# EAGLE board 006rele quad (EAGLE 5.11)

Size 142.22 x 69.52 mm. Coordinates in mm from the lower left corner, seen from the top.
Outline: 0,0 142.22,0 142.22,69.52 0,69.52 0,0
Copper layers (1*16): Top 0.035mm / dielectric 1.5mm / Bottom 0.035mm
Design rules "MUITO BOM": minimum track width 20mil, minimum drill 24mil, track to track 12mil, track to pad 12mil, pad to pad 12mil, via to via 12mil, smd to smd 12mil, copper to edge 8mil, drill to drill 8mil, minimum pad ring 8mil, minimum via ring 8mil, stop-mask expansion 4mil, vias tented up to drill 0mil, thermal gap 10mil

## Footprints (pad centres in the part's own frame; a part is rotated, then mirrored left to right if it is on the bottom)
C025_050-035X075 = drill 0.5 pad 1.27 long: 1 -1.27,0 | drill 0.5 pad 1.27 offset: 2 1.27,0; 3 3.81,0
DO41-10 = drill 0.6 pad 1.778 long: A 5.08,0; C -5.08,0
DIL20 = drill 0.813 long: 1 -11.43,-3.81; 2 -8.89,-3.81; 3 -6.35,-3.81; 4 -3.81,-3.81; 5 -1.27,-3.81; 6 1.27,-3.81; 7 3.81,-3.81; 8 6.35,-3.81; 9 8.89,-3.81; 10 11.43,-3.81; 11 11.43,3.81; 12 8.89,3.81; 13 6.35,3.81; 14 3.81,3.81; 15 1.27,3.81; 16 -1.27,3.81; 17 -3.81,3.81; 18 -6.35,3.81; 19 -8.89,3.81; 20 -11.43,3.81
G5LE = drill 1.321 long: 1 -7.493,-5.969; 2 -7.493,5.969; O 4.699,5.969; P -9.525,0; S 4.699,-5.969
LED5MM = drill 0.813 octagon: A -1.27,0; K 1.27,0
0207/7 = drill 0.5 pad 1.27 long: 1 -3.81,0; 2 3.81,0
AK500/3 = drill 1.321 long: 1 -5.004,0; 2 0,0; 3 5.004,0
AK500/10 = drill 1.321 long: 1 -22.504,0; 2 -17.501,0; 3 -12.497,0; 4 -7.493,0; 5 -2.489,0; 6 2.489,0; 7 7.493,0; 8 12.497,0; 9 17.501,0; 10 22.504,0

## Placement (x,y rotation side)
C1  100NF  [C025_050-035X075]  35.56,54.61 90 top
D1  1N4004  [DO41-10]  25.4,33.02 0 top
D2  1N4004  [DO41-10]  7.62,33.02 0 top
D3  1N4004  [DO41-10]  43.18,33.02 0 top
D4  1N4004  [DO41-10]  60.96,33.02 0 top
D5  1N4004  [DO41-10]  78.74,33.02 0 top
D6  1N4004  [DO41-10]  96.52,33.02 0 top
D7  1N4004  [DO41-10]  114.3,33.02 0 top
D8  1N4004  [DO41-10]  132.08,33.02 0 top
IC1  TPIC6B596N  [DIL20]  50.8,55.88 0 top
K1  G5L  [G5LE]  8.89,19.05 270 top
K2  G5L  [G5LE]  26.67,19.05 270 top
K3  G5L  [G5LE]  44.45,19.05 270 top
K4  G5L  [G5LE]  62.23,19.05 270 top
K5  G5L  [G5LE]  80.01,19.05 270 top
K6  G5L  [G5LE]  97.79,19.05 270 top
K7  G5L  [G5LE]  115.57,19.05 270 top
K8  G5L  [G5LE]  133.35,19.05 270 top
LED1  [LED5MM]  13.97,37.47 270 top
LED2  [LED5MM]  31.75,37.47 270 top
LED3  [LED5MM]  49.53,37.47 270 top
LED4  [LED5MM]  67.31,37.47 270 top
LED5  [LED5MM]  85.09,37.47 270 top
LED6  [LED5MM]  102.87,37.47 270 top
LED7  [LED5MM]  120.65,37.47 270 top
LED8  [LED5MM]  137.79,38.1 270 top
R1  [0207/7]  6.35,35.56 180 top
R2  [0207/7]  24.13,35.56 180 top
R3  [0207/7]  41.91,35.56 180 top
R4  [0207/7]  59.69,35.56 180 top
R5  [0207/7]  77.47,35.56 180 top
R6  [0207/7]  95.25,35.56 180 top
R7  [0207/7]  113.03,35.56 180 top
R8  [0207/7]  130.81,35.56 180 top
X1  [AK500/3]  8.89,3.81 0 top
X2  [AK500/3]  26.67,3.81 0 top
X3  [AK500/3]  44.45,3.81 0 top
X4  [AK500/3]  62.23,3.81 0 top
X5  [AK500/3]  80.01,3.81 0 top
X6  [AK500/3]  97.79,3.81 0 top
X7  [AK500/3]  115.57,3.81 0 top
X8  [AK500/3]  133.35,3.81 0 top
X9  [AK500/10]  111.12,64.77 0 top

## Library data of the parts
C1 R1-R8 = rcl
D1-D8 = diode
IC1 = tpic
K1-K8 = relay; OC_FARNELL: unknown; OC_NEWARK: unknown
LED1-LED8 = led
X1-X9 = con-ptr500; OC_FARNELL: unknown; OC_NEWARK: unknown

## Nets
GND: IC1.10 IC1.11 IC1.19
N$1: D2.A IC1.4 K1.2 LED1.K
N$2: D1.A IC1.5 K2.2 LED2.K
N$3: LED8.A R8.1
N$4: IC1.18 X9.1
N$5: D1.C D2.C D3.C D4.C D5.C D6.C D7.C D8.C K1.1 K2.1 K3.1 K4.1 K5.1 K6.1 K7.1 K8.1 LED7.A R1.2 R2.2 R3.2 R4.2 R5.2 R6.2 R7.2 R8.2 X9.10
N$7: LED6.A R6.1
N$8: IC1.3 X9.2
N$9: IC1.8 X9.3
N$10: LED5.A R5.1
N$11: D6.A IC1.15 K6.2 LED6.K
N$13: D8.A IC1.17 K8.2 LED8.K
N$14: IC1.13 X9.4
N$15: D4.A IC1.7 K4.2 LED4.K
N$16: LED4.A R4.1
N$17: D5.A IC1.14 K5.2 LED5.K
N$18: IC1.12 X9.5
N$19: IC1.9 X9.6
N$20: LED3.A R3.1
N$21: D7.A IC1.16 K7.2 LED7.K
N$22: LED2.A R2.1
N$23: C1.2 X9.9
N$24: LED1.A R1.1
N$25: D3.A IC1.6 K3.2 LED3.K
N$26: C1.1 IC1.2 X9.8
N$29: K1.O X1.3
N$30: K1.P X1.2
N$31: K1.S X1.1
N$32: K2.O X2.3
N$33: K2.P X2.2
N$34: K2.S X2.1
N$35: K3.O X3.3
N$36: K3.P X3.2
N$37: K3.S X3.1
N$38: K4.O X4.3
N$39: K4.P X4.2
N$40: K4.S X4.1
N$41: K5.O X5.3
N$42: K5.P X5.2
N$43: K5.S X5.1
N$44: K6.O X6.3
N$45: K6.P X6.2
N$46: K6.S X6.1
N$47: K7.O X7.3
N$48: K7.P X7.2
N$49: K7.S X7.1
N$50: K8.O X8.3
N$51: K8.P X8.2
N$52: K8.S X8.1

## Tracks (layer width: path | path; a pad name or v marks a point on that pad's centre or on a via)
GND  (2 unrouted)
N$1  (3 unrouted)
N$2  (3 unrouted)
N$3  (1 unrouted)
N$4  (1 unrouted)
N$5  (25 unrouted)
N$7  (1 unrouted)
N$8  (1 unrouted)
N$9  (1 unrouted)
N$10  (1 unrouted)
N$11  (3 unrouted)
N$13  (3 unrouted)
N$14  (1 unrouted)
N$15  (3 unrouted)
N$16  (1 unrouted)
N$17  (3 unrouted)
N$18  (1 unrouted)
N$19  (1 unrouted)
N$20  (1 unrouted)
N$21  (3 unrouted)
N$22  (1 unrouted)
N$23  (1 unrouted)
N$24  (1 unrouted)
N$25  (3 unrouted)
N$26  (2 unrouted)
N$29  (1 unrouted)
N$30  (1 unrouted)
N$31  (1 unrouted)
N$32  (1 unrouted)
N$33  (1 unrouted)
N$34  (1 unrouted)
N$35  (1 unrouted)
N$36  (1 unrouted)
N$37  (1 unrouted)
N$38  (1 unrouted)
N$39  (1 unrouted)
N$40  (1 unrouted)
N$41  (1 unrouted)
N$42  (1 unrouted)
N$43  (1 unrouted)
N$44  (1 unrouted)
N$45  (1 unrouted)
N$46  (1 unrouted)
N$47  (1 unrouted)
N$48  (1 unrouted)
N$49  (1 unrouted)
N$50  (1 unrouted)
N$51  (1 unrouted)
N$52  (1 unrouted)